# Altium PCB PCB1.PcbDoc
Units mil, origin at the board's own origin, x right, y up, seen from the top; angles counter-clockwise.
Board outline 6000 x 4000 mil, 2 copper layers (Top Layer, Bottom Layer); 2 components, 0 nets, 40 pads, 0 vias.
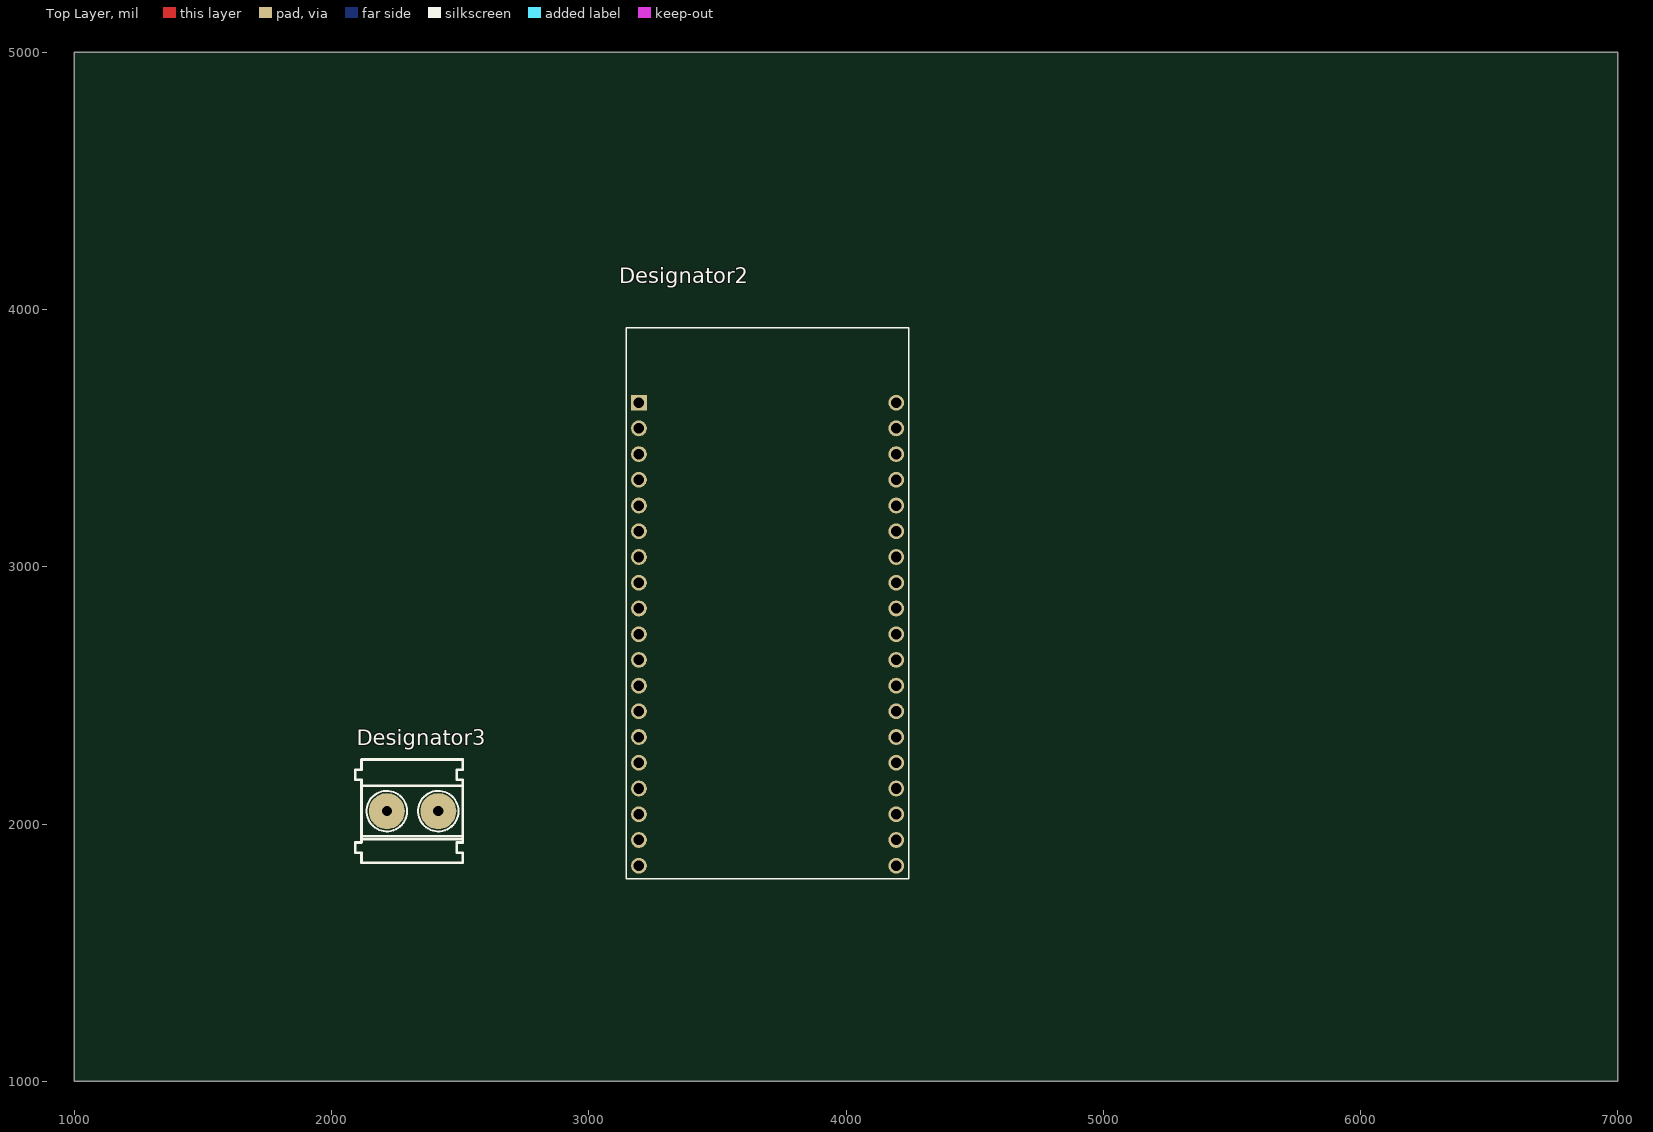
[diagram p0: Top Layer view]
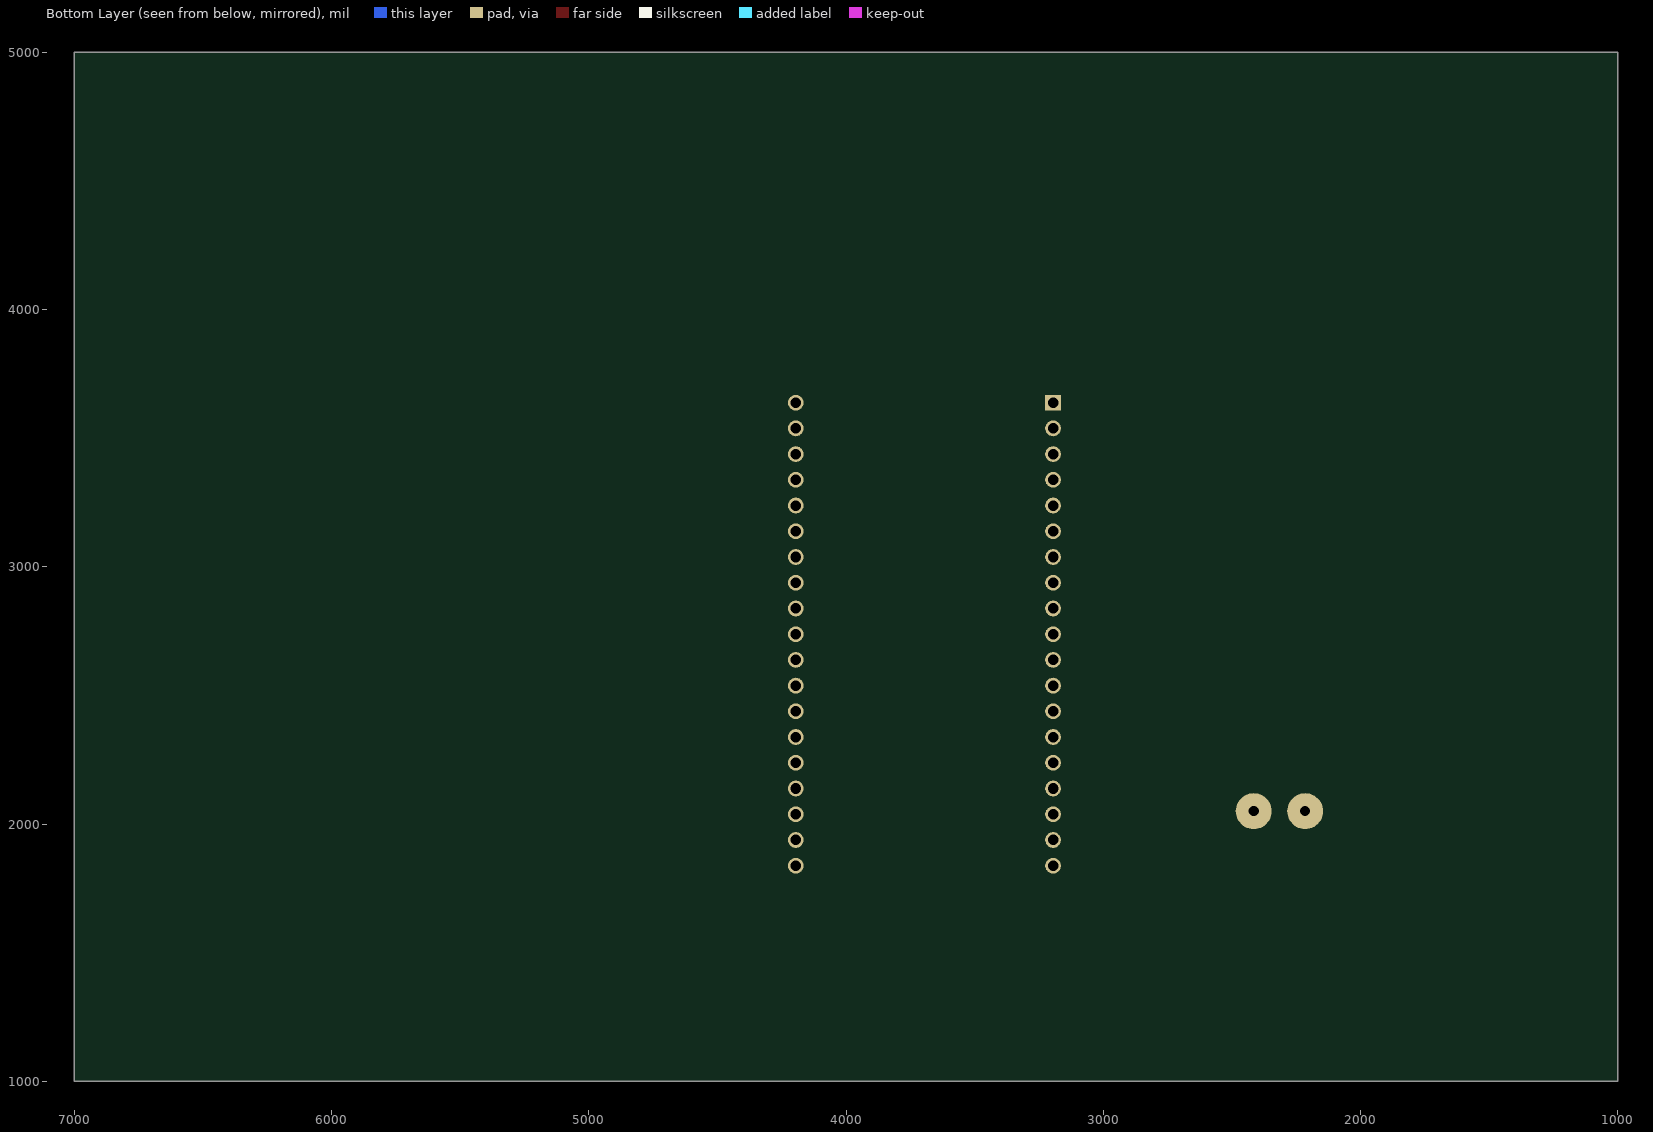
[diagram p1: Bottom Layer view, seen from below]

## Layer stack, top to bottom
Top Solder: solder mask 0.4, Solder Resist, Dk 3.5
Top Layer: signal copper 1.4
Dielectric 1: dielectric 12.6, FR-4, Dk 4.8
Bottom Layer: signal copper 1.4
Bottom Solder: solder mask 0.4, Solder Resist, Dk 3.5

## Board outline
1000,1000 7000,1000 7000,5000 1000,5000

## Design rules (kind name [scope] priority, off if disabled: settings)
Clearance [All] p1: gap=10 ignorepadtopadclearanceinfootprint=FALSE except(0: Arc-Hole Track-Hole SMDPad-Hole THPad-Hole Via-Hole Fill-Hole Poly-Hole Region-Hole Text-Hole)
PolygonConnect [All] p1: connectstyle=Relief reliefconductorwidth=10 reliefentries=4 polygonreliefangle="90 Angle" airgapwidth=10
RoutingVias [All] p1: holewidth=28 width=50 viastyle="Through Hole" minholewidth=28 minwidth=50 maxholewidth=28 maxwidth=50
SolderMaskExpansion [All] p1: expansion=4
Width [All] p1: maxlimit=10 minlimit=10 preferedwidth=10
30 further rules are at their usual default settings.

## Components (designator, comment, footprint, x,y, rotation, side; value= is the part's Value field where it differs from the comment)
Designator2 "Comment" MODULE_ESP32-DEVKITC-32D 3695,2860 r0 top
Designator3 "Comment" "TB_200Mil 2 P" 2215,2050 r0 top

## Footprints (in the part's own frame and the unit in brackets; to place one, negate y for a bottom-side part, rotate by r counter-clockwise, add the part's x,y. Pads: shape width x height; smd on the part's side, far side on the other; paste and mask are expansions set on the pad)
MODULE_ESP32-DEVKITC-32D [mm]
  rect 1.56x1.56 hole 1.04: 1(-12.7,19.76)
  round 1.56 hole 1.04: 2(-12.7,17.22) 3(-12.7,14.68) 4(-12.7,12.14) 5(-12.7,9.6) 6(-12.7,7.06) 7(-12.7,4.52) 8(-12.7,1.98) 9(-12.7,-0.56) 10(-12.7,-3.1) 11(-12.7,-5.64) 12(-12.7,-8.18) 13(-12.7,-10.72) 14(-12.7,-13.26) 15(-12.7,-15.8) 16(-12.7,-18.34) 17(-12.7,-20.88) 18(-12.7,-23.42) 19(-12.7,-25.96) 20(12.7,19.76) 21(12.7,17.22) 22(12.7,14.68) 23(12.7,12.14) 24(12.7,9.6) 25(12.7,7.06) 26(12.7,4.52) 27(12.7,1.98) 28(12.7,-0.56) 29(12.7,-3.1) 30(12.7,-5.64) 31(12.7,-8.18) 32(12.7,-10.72) 33(12.7,-13.26) 34(12.7,-15.8) 35(12.7,-18.34) 36(12.7,-20.88) 37(12.7,-23.42) 38(12.7,-25.96)
  silkscreen extent -13.95,-27.25 13.95,27.15, body extent -13.97,-24.8 13.97,30.3, height 3.25
"TB_200Mil 2 P" [mil]
  round 140 hole 39.37: 1(0,0) 2(200,0)
  silkscreen extent -122,-201 295,201, body extent -121,-202 296,200, height 551

## Nets (pads, with @x,y where several pads share a name; then routed paths per layer and width w, separated by ;. In a path a pad name is that pad's centre, name@x,y a point inside that pad or via, vN(x,y) a via of type N, cw(c..) or ccw(c..) an arc to the next point about the centre after c; other vN are vias at no path point)
pads on no net: Designator2.1 Designator2.2 Designator2.3 Designator2.4 Designator2.5 Designator2.6 Designator2.7 Designator2.8 Designator2.9 Designator2.10 Designator2.11 Designator2.12 Designator2.13 Designator2.14 Designator2.15 Designator2.16 Designator2.17 Designator2.18 Designator2.19 Designator2.20 Designator2.21 Designator2.22 Designator2.23 Designator2.24 Designator2.25 Designator2.26 Designator2.27 Designator2.28 Designator2.29 Designator2.30 Designator2.31 Designator2.32 Designator2.33 Designator2.34 Designator2.35 Designator2.36 Designator2.37 Designator2.38 Designator3.1 Designator3.2